# Altium PCB PCB.PcbDoc
Units mil, origin at the board's own origin, x right, y up, seen from the top; angles counter-clockwise.
Board outline 4690 x 3375 mil, 2 copper layers (Top Layer, Bottom Layer); 10 components, 17 nets, 74 pads, 0 vias.
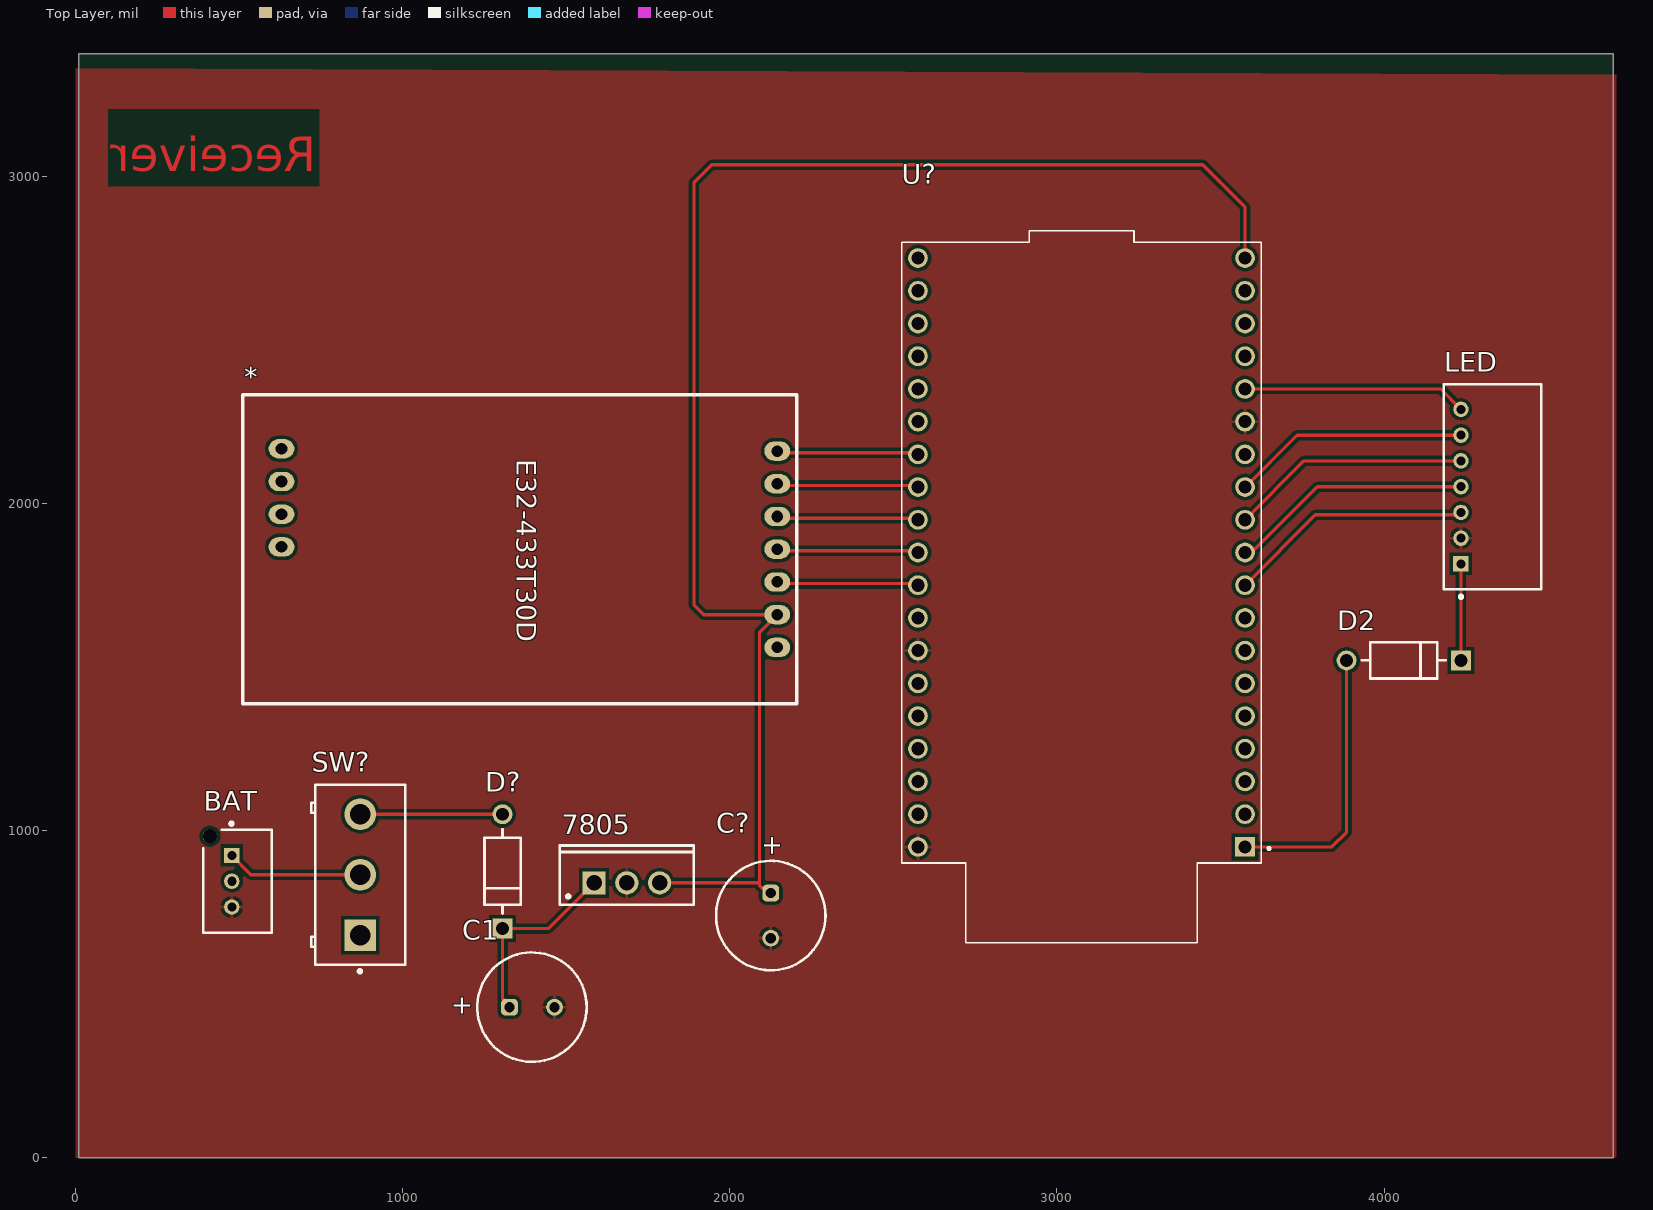
[diagram p0: Top Layer view]
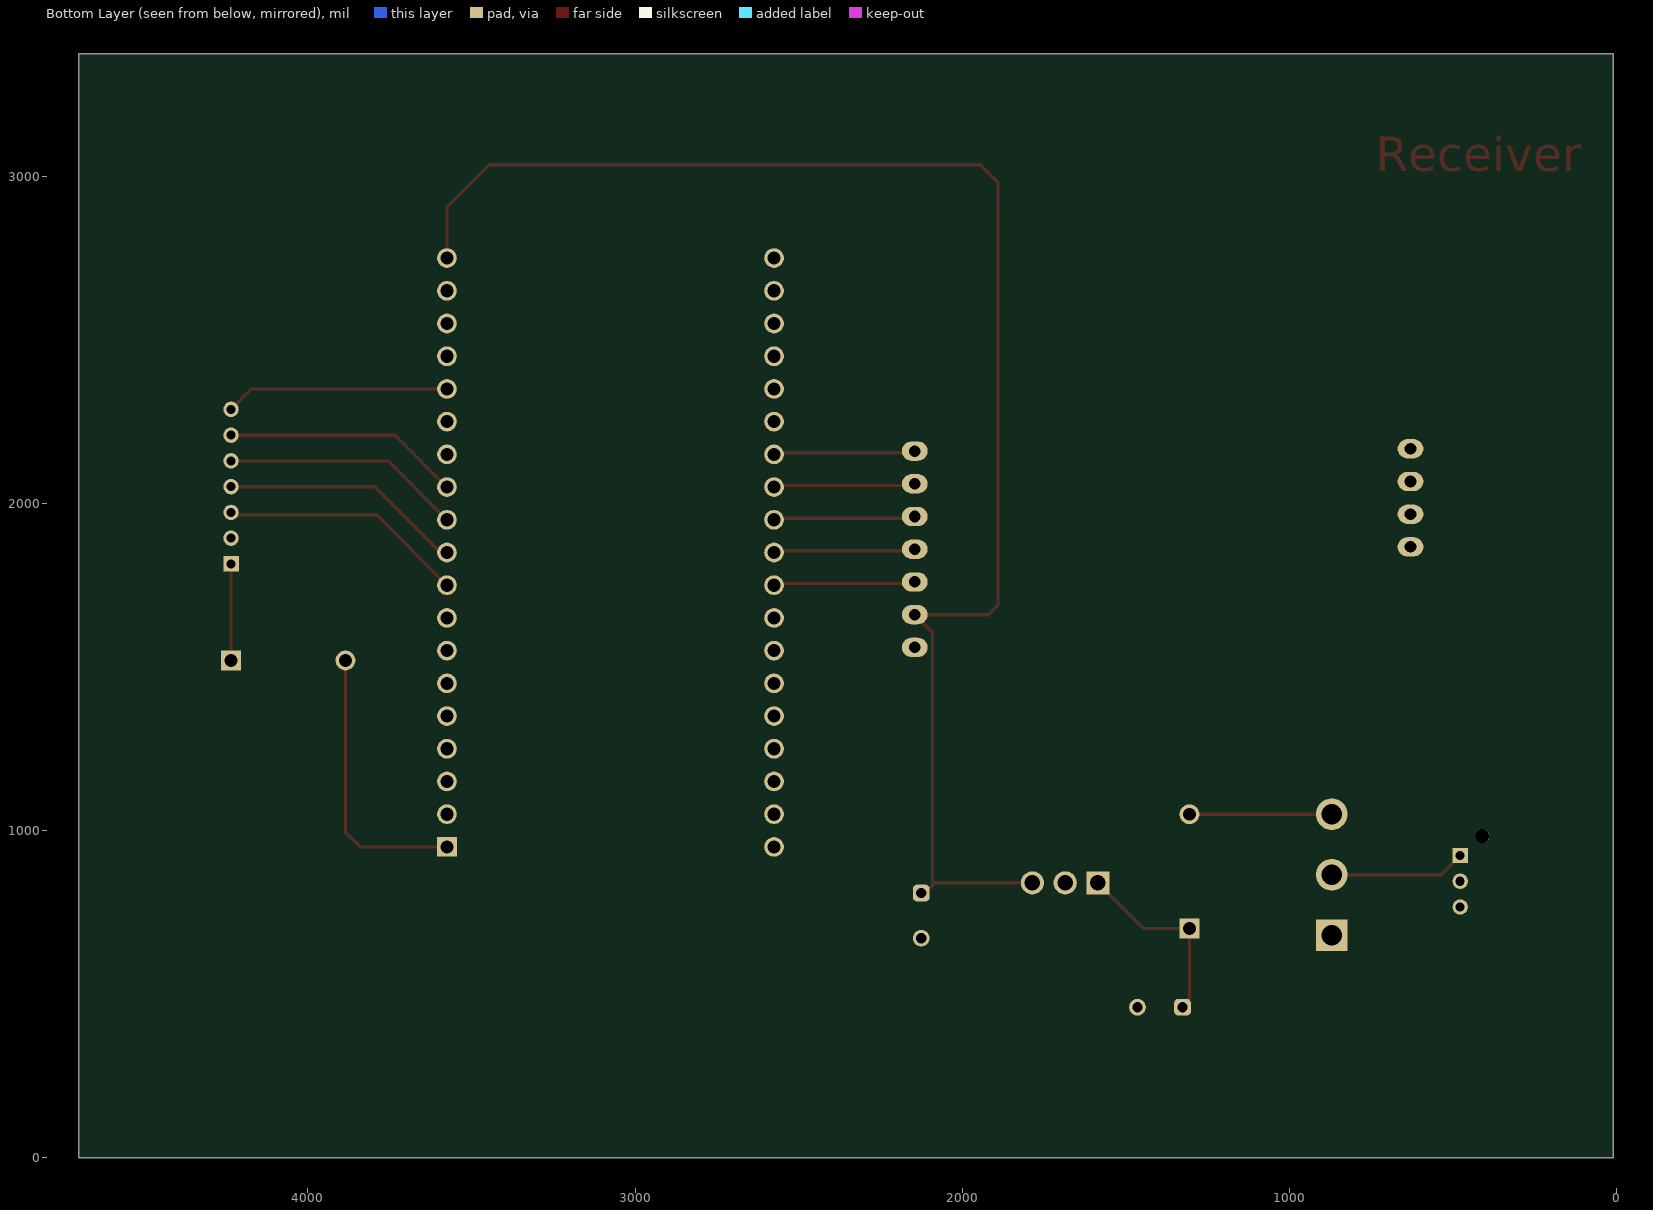
[diagram p1: Bottom Layer view, seen from below]
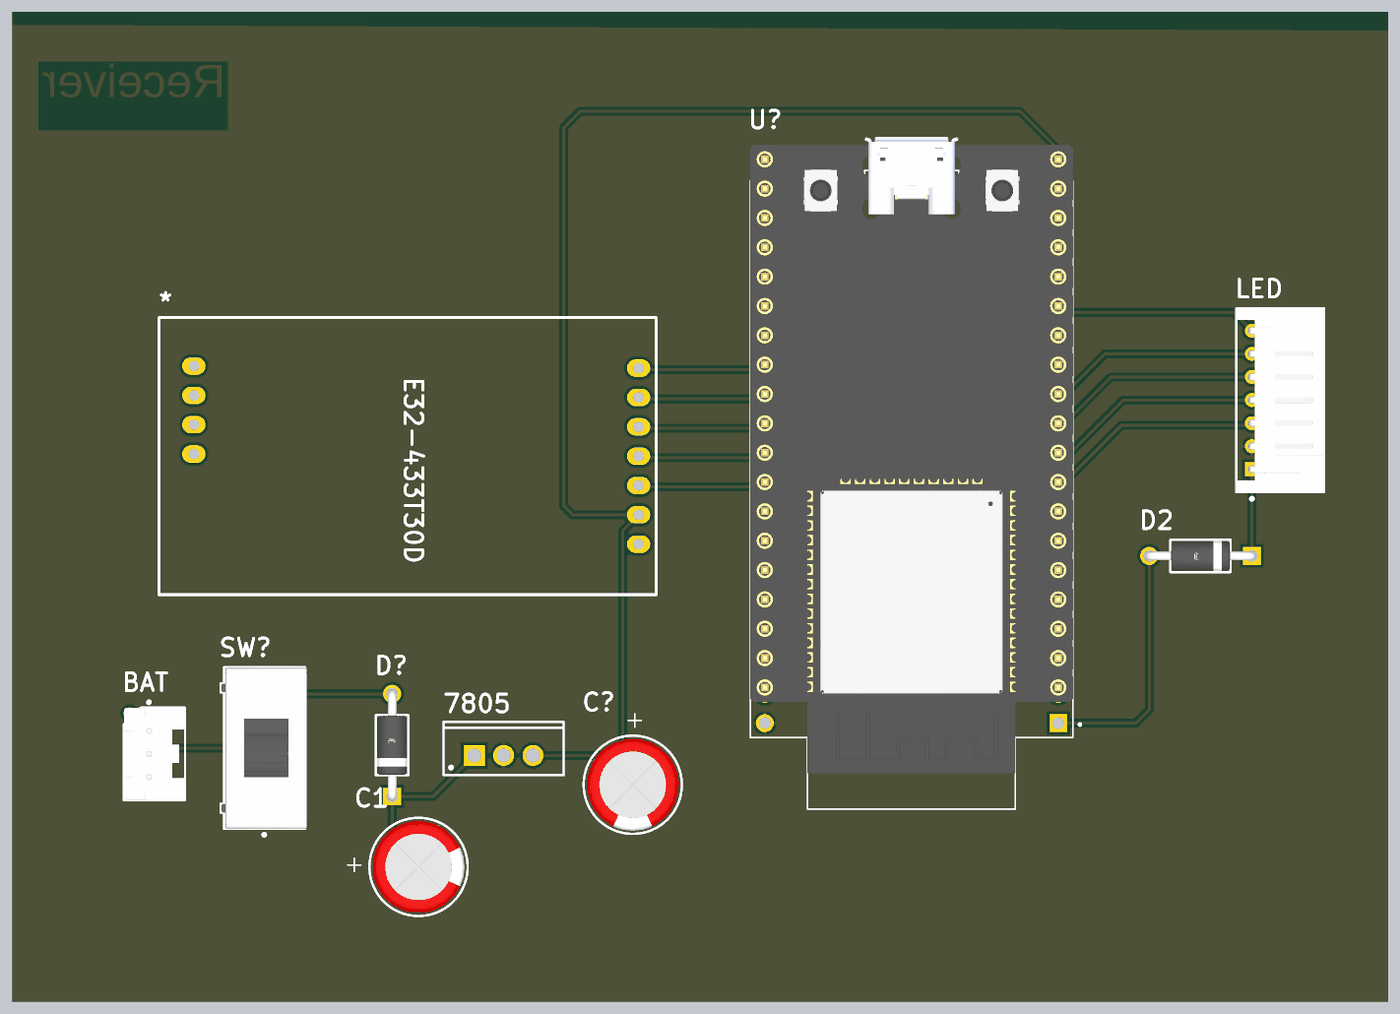
[diagram p2: 3D render of the assembled board from above, using the file's embedded part models]

## Layer stack, top to bottom
Top Solder: solder mask 0.4, Solder Resist, Dk 3.5
Top Layer: signal copper 1.4
Dielectric 1: dielectric 12.6, FR-4, Dk 4.8
Bottom Layer: signal copper 1.4
Bottom Solder: solder mask 0.4, Solder Resist, Dk 3.5

## Board outline
10,0 4700,0 4700,3375 10,3375

## Design rules (kind name [scope] priority, off if disabled: settings)
Clearance [All] p1: gap=10 ignorepadtopadclearanceinfootprint=FALSE
PolygonConnect [All] p1: connectstyle=Relief reliefconductorwidth=10 reliefentries=4 polygonreliefangle="90 Angle" airgapwidth=10
RoutingVias [All] p1: holewidth=28 width=50 viastyle="Through Hole" minholewidth=28 minwidth=50 maxholewidth=28 maxwidth=50
SolderMaskExpansion [All] p1: expansion=0 istentingtop=FALSE
SupplyNets "Schematic Supply Nets_1" [InNet('+5')] p1: voltage=0.000
SupplyNets "Schematic Supply Nets" [InNet('GND')] p2: voltage=0.000
Width [All] p1: maxlimit=10 minlimit=10 preferedwidth=10
30 further rules are at their usual default settings.

## Components (designator, comment, footprint, x,y, rotation, side; value= is the part's Value field where it differs from the comment)
7805 "L7805CP" TO220FP 1685,840 r0 top
* "E32-433T30D" E32-433T30D 511.14,2332.44 r270 top
BAT "B03B-PASK-1(LF)(SN)" FP-B03B-PASK-1_LF_SN-MFG 495,845 r90 top
C1 "860160274015" WCAP-ATLL_D8H11.5 1395,460 r180 top
C? "860160274015" WCAP-ATLL_D8H11.5 2125,740 r90 top
D2 "1N4007" FP-1N4007-MFG 4060,1520 r180 top value=15pF
D? "1N4007" FP-1N4007-MFG 1305,875 r90 top value=15pF
LED "S7B-PH-K-S(LF)(SN)" FP-S7B-PH-K-S_LF_SN-MFG 4331.46,2051.26 r270 top
SW? "CS12ANW03" FP-CS12ANW03-MFG 870,865.04 r90 top
U? "ESP32-DEVKITC" MODULE_ESP32-DEVKITC 3075,1849.61 r180 top

## Footprints (in the part's own frame and the unit in brackets; to place one, negate y for a bottom-side part, rotate by r counter-clockwise, add the part's x,y. Pads: shape width x height; smd on the part's side, far side on the other; paste and mask are expansions set on the pad)
E32-433T30D [mm]
  oval 1.5x2 hole 0.9: 1(4.38,41.5) 2(6.92,41.5) 3(9.46,41.5) 4(12,41.5) 5(14.54,41.5) 6(17.08,41.5) 7(19.62,41.5) 8(11.82,3) 9(9.28,3) 10(6.74,3) 11(4.2,3)
  silkscreen extent 0,0 24,43
FP-1N4007-MFG [mm]
  rect 1.55x1.55 hole 1 paste-2539.97 mask+0: 1(-4.44,0)
  round 1.55 hole 1 paste-2539.97 mask+0: 2(4.44,0)
  silkscreen extent -3.26,-1.4 3.26,1.4, body extent -5.32,-1.5 5.32,1.5, height 0.25
FP-B03B-PASK-1_LF_SN-MFG [mm]
  rect 1.2x1.2 hole 0.7 paste-2539.97 mask+0: 1(2,0.45)
  round 1.2 hole 0.7 paste-2539.97 mask+0: 2(0,0.45) 3(-2,0.45)
  round 1.1 hole 1.1 unplated paste-2539.97 mask+0: ""(3.5,2.15)
  silkscreen extent -4,-2.65 4.6,2.65, body extent -4.1,-2.75 4.15,2.8, height 0.25
FP-CS12ANW03-MFG [mm]
  rect 2.45x2.45 hole 1.6 paste-2539.97 mask+0: 1(-4.7,0)
  round 2.45 hole 1.6 paste-2539.97 mask+0: 2(0,0) 3(4.7,0)
  silkscreen extent -7.62,-3.5 7,3.8, body extent -7.1,-3.6 7.1,3.91, height 0.25
FP-S7B-PH-K-S_LF_SN-MFG [mm]
  rect 1.2x1.2 hole 0.7 paste-2539.97 mask+0: 1(6,-2.45)
  round 1.2 hole 0.7 paste-2539.97 mask+0: 2(4,-2.45) 3(2,-2.45) 4(0,-2.45) 5(-2,-2.45) 6(-4,-2.45) 7(-6,-2.45)
  silkscreen extent -7.95,-3.8 8.67,3.8, body extent -8.05,-3.9 8.05,3.9, height 0.25
MODULE_ESP32-DEVKITC [mm]
  rect 1.53x1.53 / inner round 1.53 / far side rect 1.53x1.53 hole 1.02: 1(-12.7,22.85)
  round 1.53 hole 1.02: 2(-12.7,20.31) 3(-12.7,17.77) 4(-12.7,15.23) 5(-12.7,12.69) 6(-12.7,10.15) 7(-12.7,7.61) 8(-12.7,5.07) 9(-12.7,2.53) 10(-12.7,-0.01) 11(-12.7,-2.55) 12(-12.7,-5.09) 13(-12.7,-7.63) 14(-12.7,-10.17) 15(-12.7,-12.71) 16(-12.7,-15.25) 17(-12.7,-17.79) 18(-12.7,-20.33) 19(-12.7,-22.87) 20(12.7,-22.87) 21(12.7,-20.33) 22(12.7,-17.79) 23(12.7,-15.25) 24(12.7,-12.71) 25(12.7,-10.17) 26(12.7,-7.63) 27(12.7,-5.09) 28(12.7,-2.55) 29(12.7,-0.01) 30(12.7,2.53) 31(12.7,5.07) 32(12.7,7.61) 33(12.7,10.15) 34(12.7,12.69) 35(12.7,15.23) 36(12.7,17.77) 37(12.7,20.31) 38(12.7,22.85)
  silkscreen extent -14.67,-25 13.95,30.3, body extent -13.97,-27.9 13.97,27.2, height 6.69
TO220FP [mm] "TO, Thru-Hole, Vertical, Heatsink Mounted; 3 In-Line Leads; Pitch 2.54 mm"
  rect 1.8x1.8 hole 1.2: 1(-2.54,0)
  round 1.8 hole 1.2: 2(0,0) 3(2.54,0)
  silkscreen extent -5.2,-1.7 5.2,2.9, body extent -5.25,-1.75 5.25,2.95, height 20
WCAP-ATLL_D8H11.5 [mm] "Aluminum Electrolytic Capacitors, 8x11.5mm"
  rrect50% 1.3x1.3 hole 0.8: 1(1.75,0)
  round 1.3 hole 0.8: 2(-1.75,0)
  silkscreen extent -4.25,-4.25 4.25,4.25, body extent -3.99,-4 4,4, height 11.81

## Part data
7805: library part CMP-0244-00474-1, "Positive Voltage Regulator, 5V, 3-Pin TO-220FP", ComponentLink1Description="Manufacturer URL", ComponentLink1URL=http://www.st.com, ComponentLink2Description=Datasheet, ComponentLink2URL=http://www.st.com/internet/com/TECHNICAL_RESOURCES/TECHNICAL_LITERATURE/DATASHEET/CD00000444.pdf, DatasheetVersion=16/11/2011, PackageDescription="TO, Thru-Hole, Vertical, Heatsink Mounted; 3 In-Line Leads; Pitch 2.54 mm", PackageReference=TO220FP, PackageVersion=2011
BAT: library part CMP-17439-000193-1, "CONN HEADER VERT 3POS 2MM", Color=Natural, Current Rating=3A, Flammability Rating="UL94 V-0", Housing Color=White, Voltage Rating=250V, Connector Type=Header, Contact Finish - Mating=TIN, Contact Material="Copper Alloy", Contact Mating Length=0.126inch, Contact Plating=Tin, Contact Shape=Square, Contact Type="Male Pin", Fastening Type=Ramp, Insulation Color=Natural, Insulation Material=PBT, Lead Free="Lead Free", Mated Stacking Heights=14.9mm, Mount="Through Hole", Number of Contacts=3, Number of Positions=3, Number of Rows=1, Orientation=Straight, Packaging=Bulk, Pitch=2mm, Series=PA, Termination=Solder
C1 C?: library part CMP-03913-54007388-2, "Aluminium Electrolytic Capacitor-Leaded Rohs Compliant: Yes", Capacitance=270µF, Case/Package=Radial, Leakage Current=27µA, Max Operating Temperature=105°C, Min Operating Temperature=-55°C, Ripple Current=420mA, Tolerance=20%, Voltage Rating=10V, Diameter=8mm, Height - Seated (Max)=13.0048mm, Impedance=530mΩ, Lead Pitch=3.5052mm, Length=11.5mm, Life (Hours)=7000hours, Mount="Through Hole", Packaging="Tape & Box (TB)", Pitch=3.5mm, Polarity=Polar, RoHS=Compliant
D2 D?: library part CMP-123542-000001-1, "Rectifier diode 1000 V 1 A DO-41, ,", Capacitance=15pF, Forward Current=1A, Manufacturer=Diotec, Max Junction Temp=+175°C, Max Repetitive Reverse Voltage=1000V, Max Surge Forward Current=27A, Peak Reverse Current=5uA, Temperature="-50°C to +175°C", Temperature Range Low=-50°C, Automotive=No, Category=Diode, ComponentLink2Description=Datasheet, ComponentLink2URL=https://datasheet.octopart.com/1N4007-Diotec-datasheet-62346875.pdf, Device Class L1="Discrete Semiconductors", Device Class L2=Diodes, Device Class L3="Rectifier Diodes", Height=2.8mm, Ipc Land Pattern Name=DIOAD888W100L520D280, Lead Free=Yes, Manufacturer Part Number=1N4007, Octopart=https://octopart.com/1n4007-diotec-4040411, Package=1N4007, Reverse Voltage=1000V, RoHS=TRUE, Temperature Range High=+175°C
LED: library part CMP-17439-000222-1, "CONN HEADER R/A 7POS 2MM", Color=Natural, Contact Resistance=20mR, Current Rating=2A, Flammability Rating="UL94 V-0", Housing Color=White, Insulation Resistance=1GR, Max Operating Temperature=85°C, Max Voltage Rating (AC)=100V, Min Operating Temperature=-25°C, Connector Type=Header, Contact Finish - Mating=TIN, Contact Material=Brass, Contact Mating Length=0.13inch, Contact Plating=Tin, Contact Shape=Square, Contact Type="Male Pin", Depth=7.6mm, Fastening Type=Detent, Gender=Male, Height=9.4mm, Housing Material=Polyamide, Insulation Color=Natural, Insulation Material=Nylon, Lead Free="Lead Free", Lead Pitch=2mm, Length=15.9mm, Max Current Rating=2A, Mount="Through Hole", Number of Contacts=7, Number of Pins=7, Number of Poles=7, Number of Positions=7, Number of Rows=1, Orientation="Right Angle", Packaging=Bulk, Pitch=2mm, REACH SVHC="No SVHC", Series=PH, Termination=Solder, Voltage Rating=100V, Voltage Rating (AC)=100V, Width=4.5mm, Working Voltage=100V
SW?: library part CMP-31746-000002-1, "SWITCH SLIDE SPDT 3A 125V", Contact Current Rating=3A, Flammability Rating="UL94 V-0", Max Operating Temperature=85°C, Max Voltage Rating (AC)=250V, Min Operating Temperature=-30°C, Package Quantity=1, Voltage Rating (AC)=125V, Actuator Length=5.1mm, Actuator Material=Nylon, Actuator Type=Standard, Contact Material=Copper, Contact Plating=Silver, Contact Style=Non-Shorting, Current Rating=3A, Depth=7.5mm, Electrical Life=20000Cycles, Illumination Type=Non-Illuminated, Lead Free="Lead Free", Length=14mm, Max Current Rating=3A, Mechanical Life=50000Cycles, Mount="Through Hole", Orientation=Vertical, Packaging=Tray, Primary Type=SWITCH, Reach SVHC Compliant=Yes, RoHS Compliant=Yes, Series=CS, Switch Function=On-On, Switch Travel=2.2mm, Termination="PC Pin", Throw Configuration=SPDT
U?: "Transceiver; 802.11 b/g/n (Wi-Fi, WiFi, WLAN), BluetoothÂ® Smart Ready 4.x Dual Mode", Package=None, Check_prices=https://www.snapeda.com/parts/ESP32-DEVKITC-32D-F/Espressif+Systems/view-part/?ref=eda, MF="Espressif Systems", MP=ESP32-DEVKITC-32D-F, SnapEDA_Link=https://www.snapeda.com/parts/ESP32-DEVKITC-32D-F/Espressif+Systems/view-part/?ref=snap

## Nets (pads, with @x,y where several pads share a name; then routed paths per layer and width w, separated by ;. In a path a pad name is that pad's centre, name@x,y a point inside that pad or via, vN(x,y) a via of type N, cw(c..) or ccw(c..) an arc to the next point about the centre after c; other vN are vias at no path point)
+5: 7805.3 *.6 C?.1 U?.19 | length 4674.6
  Top Layer w10: 7805.3 2090.63,840 ; C?.1 2109.22,824.68 2097.1,824.68 2090.63,831.14 2090.63,840 ; U?.19 3575,2905 3445,3035 1945,3035 1890,2980 1890,1690 1920,1660 *.6 2090.63,1605.63 2090.63,840
GND: 7805.2 BAT.3 C1.2 C?.2 LED.2 U?.14 U?.32 U?.38
Net7805_1: 7805.1 C1.1 D?.1 | length 586.8
  Top Layer w10: C1.1 1326.1,464.22 1305,485.32 D?.1 1445.2,700.2 7805.1
Net*_1: *.1 U?.26 | length 434.1
  Top Layer w10: *.1 2150,2155 2570,2155 U?.26
Net*_2: *.2 U?.27 | length 434.1
  Top Layer w10: *.2 2150,2055 2570,2055 U?.27
Net*_3: *.3 U?.28 | length 434.1
  Top Layer w10: *.3 2150,1955 2570,1955 U?.28
Net*_4: *.4 U?.29 | length 434.1
  Top Layer w10: *.4 2150,1855 2570,1855 U?.29
Net*_5: *.5 U?.30 | length 434.1
  Top Layer w10: *.5 2150,1755 2570,1755 U?.30
NetBAT_1: BAT.1 SW?.2 | length 417
  Top Layer w10: BAT.1 535.98,865.04 SW?.2
NetD2_1: D2.1 LED.1 | length 295.1
  Top Layer w10: D2.1 4235,1520.2 LED.1
NetD2_2: D2.2 U?.1 | length 853.7
  Top Layer w10: U?.1 3840,950 3885.2,995.2 D2.2
NetD?_2: D?.2 SW?.3 | length 435.1
  Top Layer w10: SW?.3 870.14,1049.94 1304.86,1049.94 D?.2
NetLED_3: LED.3 U?.9 | length 752.2
  Top Layer w10: U?.9 3790,1965 4210.52,1965 4210.91,1965.39 4227.87,1965.39 LED.3
NetLED_4: LED.4 U?.10 | length 743.4
  Top Layer w10: U?.10 3584.61,1859.61 3604.61,1859.61 3796.26,2051.26 LED.4
NetLED_5: LED.5 U?.11 | length 734.6
  Top Layer w10: U?.11 3755,2130 LED.5
NetLED_6: LED.6 U?.12 | length 725.8
  Top Layer w10: U?.12 3733.74,2208.74 LED.6
NetLED_7: LED.7 U?.15 | length 685.9
  Top Layer w10: U?.15 4172.48,2350 LED.7
pads on no net: *.7 *.8 *.9 *.10 *.11 BAT. BAT.2 SW?.1 U?.2 U?.3 U?.4 U?.5 U?.6 U?.7 U?.8 U?.13 U?.16 U?.17 U?.18 U?.20 U?.21 U?.22 U?.23 U?.24 U?.25 U?.31 U?.33 U?.34 U?.35 U?.36 U?.37

## Polygon pours and split planes (outlines as drawn)
GND on Top Layer "GND_L01_P000" (solid, pour order 0): 0,3320 0.09,3330 4710,3310 4710,-5 4705,0 0,0

## Other copper
Top Layer:
  text "Receiver" at 735,2980 h180

## Text inside footprints (layer, text, board x,y; h text height)
C1: Top Overlay "+" at 1215.87,489.53 h59.06 r180
C?: Top Overlay "+" at 2154.53,919.13 h59.06 r90